# EAGLE board CT_schematic (EAGLE 7.6.0)

Size 100 x 80 mm. Coordinates in mm from the lower left corner, seen from the top.
Outline: 0,0 100,0 100,80 0,80 0,0
Copper layers (1*16): Top 0.035mm / dielectric 1.5mm / Bottom 0.035mm
Design rules "default": minimum track width 10mil, minimum drill 24mil, track to track 8mil, track to pad 8mil, pad to pad 8mil, via to via 8mil, smd to smd 8mil, copper to edge 40mil, drill to drill 8mil, minimum pad ring 10mil, minimum via ring 8mil, stop-mask expansion 4mil, vias tented up to drill 0mil, thermal gap 10mil

## Footprints (pad centres in the part's own frame; a part is rotated, then mirrored left to right if it is on the bottom)
C0603 = smd 0.8 x 0.8: 1 -0.762,0; 2 0.762,0
C0402 = smd 0.5 x 0.5: 1 -0.508,0; 2 0.508,0
EXV-9B = smd 2.718 x 1.778: 1 -2.108,0; 2 2.108,0
EXV-9H = smd 3.505 x 1.676: 1 -2.857,0; 2 2.857,0
L0603 = smd 0.8 x 0.8: 1 -0.762,0; 2 0.762,0
PJ-037B_PACKAGE = drill 3.7 square: 1 12,0 | drill 3.2 square: 2 6,0
R0603 = smd 0.8 x 0.8: 1 -0.762,0; 2 0.762,0
TSSOP20 = smd 1.473 x 0.356: 1 -2.819,2.921; 2 -2.819,2.286; 3 -2.819,1.626; 4 -2.819,0.965; 5 -2.819,0.33; 6 -2.819,-0.33; 7 -2.819,-0.965; 8 -2.819,-1.626; 9 -2.819,-2.286; 10 -2.819,-2.921; 11 2.819,-2.921; 12 2.819,-2.286; 13 2.819,-1.626; 14 2.819,-0.965; 15 2.819,-0.33; 16 2.819,0.33; 17 2.819,0.965; 18 2.819,1.626; 19 2.819,2.286; 20 2.819,2.921
TST-110-05-T-D-RA = drill 1 pad 1.7 square: 1 0,0 | drill 1 pad 1.7: 2 0,2.54; 3 2.54,0; 4 2.54,2.54; 5 5.08,0; 6 5.08,2.54; 7 7.62,0; 8 7.62,2.54; 9 10.16,0; 10 10.16,2.54; 11 12.7,0; 12 12.7,2.54; 13 15.24,0; 14 15.24,2.54; 15 17.78,0; 16 17.78,2.54; 17 20.32,0; 18 20.32,2.54; 19 22.86,0; 20 22.86,2.54
ASFL1 = smd 1.7 x 1.5: 1 -1.27,-1.1; 2 1.27,-1.1; 3 1.27,1.1; 4 -1.27,1.1
LP2954 = smd 1.6 x 0.6: 1 -2.475,1.905 | smd 1.55 x 0.6: 2 -2.475,0.635; 3 -2.475,-0.635; 4 -2.475,-1.905; 5 2.475,-1.905; 6 2.475,-0.635; 7 2.475,0.635; 8 2.475,1.905
SON-6 = smd 0.55 x 0.3: 1 -0.355,0.5 | smd 0.52 x 0.3: 2 -0.37,0; 3 -0.37,-0.5; 4 0.37,-0.5; 5 0.37,0; 6 0.37,0.5
SW_4-1437565-2 = smd 1.4 x 2.1: 1 -2.23,4.55; 2 -2.23,-4.55; 3 2.23,4.55; 4 2.23,-4.55
LGM67K-G1J2-24-Z = smd 0.8 x 1.4: A -2,0; C 0,0
NC7SZ125M5X = smd 1.3 x 0.7: 1 -1.3,0.95; 2 -1.3,0; 3 -1.3,-0.95; 4 1.3,-0.95; 5 1.3,0.95

## Placement (x,y rotation side)
C1  1e-07  [C0603]  -27.94,63.5 0 top  (outside the outline)
C2  1e-07  [C0603]  -31.75,63.5 0 top  (outside the outline)
C3  4.7e-06  [C0603]  -24.13,63.5 0 top  (outside the outline)
C4  1e-08  [C0603]  -35.56,63.5 0 top  (outside the outline)
C5  1e-06  [C0603]  -39.37,63.5 0 top  (outside the outline)
C6  1e-07  [C0402]  -15.24,68.58 0 top  (outside the outline)
C7  1e-08  [C0402]  -19.05,68.58 0 top  (outside the outline)
C8  1e-06  [EXV-9B]  -40.64,49.53 0 top  (outside the outline)
C9  2.2e-06  [EXV-9B]  -49.53,49.53 0 top  (outside the outline)
C10  1e-07  [C0402]  -22.86,68.58 0 top  (outside the outline)
C11  0.0001  [EXV-9H]  -54.61,43.18 0 top  (outside the outline)
C12  0.0001  [EXV-9H]  -17.78,50.8 0 top  (outside the outline)
C13  1e-08  [C0402]  -26.67,68.58 0 top  (outside the outline)
C14  1e-08  [C0402]  -30.48,68.58 0 top  (outside the outline)
F1  240.0  [L0603]  -43.18,63.5 0 top  (outside the outline)
J1  PJ-037B  [PJ-037B_PACKAGE]  -49.53,7.62 0 top  (outside the outline)
R1  10000.0  [R0603]  -53.34,57.15 0 top  (outside the outline)
R2  1000.0  [R0603]  -46.99,63.5 0 top  (outside the outline)
R3  1600.5  [R0603]  -50.8,63.5 0 top  (outside the outline)
R4  4700.0  [R0603]  -54.61,63.5 0 top  (outside the outline)
R5  10000.0  [R0603]  -58.42,57.15 0 top  (outside the outline)
R6  100000.0  [R0603]  -27.94,57.15 0 top  (outside the outline)
R7  100000.0  [R0603]  -33.02,57.15 0 top  (outside the outline)
R8  164658.62  [R0603]  -22.86,57.15 0 top  (outside the outline)
R9  100000.0  [R0603]  -38.1,57.15 0 top  (outside the outline)
R10  10000.0  [R0603]  -15.24,63.5 0 top  (outside the outline)
R11  10000.0  [R0603]  -20.32,63.5 0 top  (outside the outline)
R12  9100.0  [R0603]  -58.42,63.5 0 top  (outside the outline)
R13  680000.0  [R0603]  -43.18,57.15 0 top  (outside the outline)
R14  120000.0  [R0603]  -48.26,57.15 0 top  (outside the outline)
U1  stm32f042f4p7  [TSSOP20]  -30.48,8.89 0 top  (outside the outline)
U2  TST-110-05-T-D-RA  [TST-110-05-T-D-RA]  -46.99,40.64 0 top  (outside the outline)
U3  ASFL1-25MHZ-NCS  [ASFL1]  -26.67,34.29 0 top  (outside the outline)
U4  LP2954AIMX/NOPB  [LP2954]  -44.45,22.86 0 top  (outside the outline)
U5  TPS3895ADRYR  [SON-6]  -33.02,67.31 0 top  (outside the outline)
U6  4-1437565-2  [SW_4-1437565-2]  -27.94,24.13 0 top  (outside the outline)
U7  Q65110A2395  [LGM67K-G1J2-24-Z]  -27.94,50.8 0 top  (outside the outline)
U8  nc7sz125m5x  [NC7SZ125M5X]  -57.15,49.53 0 top  (outside the outline)
U9  nc7sz125m5x  [NC7SZ125M5X]  -15.24,57.15 0 top  (outside the outline)

## Library data of the parts
C1-C14 F1 J1 R1-R14 U1-U9 = circuit_tree

## Nets
CLK_U1_2: U1.2 U3.3
GND: C1.2 C2.2 C3.2 C4.2 C5.2 C6.2 C7.2 C8.2 C9.2 C10.2 C11.2 C12.2 C13.2 C14.2 J1.2 R2.2 R9.2 R12.2 R14.2 U1.15 U2.4 U2.6 U2.8 U2.10 U2.12 U2.14 U2.16 U2.18 U2.20 U3.2 U4.4 U5.2 U7.C U8.2 U8.3 U9.1 U9.3
NET_U1_4: R4.1 U1.4 U9.4
NET_U1_5: C4.1 C5.1 F1.1 U1.5
NET_U1_17: R3.1 U1.17 U7.A
NET_U1_18: R1.1 U1.18 U6.3 U6.4
NET_U4_3: R7.1 U4.3
NET_U4_5: R6.1 U4.5
NET_U4_7: R8.2 R9.1 U4.7
NET_U5_1: R11.1 R12.1 U5.1
NET_U5_3: R13.2 R14.1 U5.3
NET_U5_4: R10.1 U5.4 U8.4 U9.2
NET_U6_1: R2.1 U6.1 U6.2
PROC_SYS_SWCLK: U1.20 U2.9
PROC_SYS_SWDIO: U1.19 U2.7
RST_OUT_U2_SRESET_B: R5.1 U2.15 U8.1
VCC_S1_8V6: C8.1 C11.1 C12.1 J1.1 R7.2 U4.8
VCC_TIER1_3V3: C1.1 C2.1 C3.1 C6.1 C7.1 C9.1 C10.1 C13.1 C14.1 F1.2 R1.2 R3.2 R4.2 R5.2 R6.2 R8.1 R10.2 R11.2 R13.1 U1.16 U2.1 U3.4 U4.1 U5.6 U8.5 U9.5

## Tracks (layer width: path | path; a pad name or v marks a point on that pad's centre or on a via)
CLK_U1_2  (1 unrouted)
GND  (36 unrouted)
NET_U1_4  (2 unrouted)
NET_U1_5  (3 unrouted)
NET_U1_17  (2 unrouted)
NET_U1_18  (3 unrouted)
NET_U4_3  (1 unrouted)
NET_U4_5  (1 unrouted)
NET_U4_7  (2 unrouted)
NET_U5_1  (2 unrouted)
NET_U5_3  (2 unrouted)
NET_U5_4  (3 unrouted)
NET_U6_1  (2 unrouted)
PROC_SYS_SWCLK  (1 unrouted)
PROC_SYS_SWDIO  (1 unrouted)
RST_OUT_U2_SRESET_B  (2 unrouted)
VCC_S1_8V6  (5 unrouted)
VCC_TIER1_3V3  (25 unrouted)